# Altium PCB Motor Controller.PcbDoc (part 2 of 2)
Units mil, origin at the board's own origin, x right, y up, seen from the top; angles counter-clockwise.
Board outline 2165.35 x 2283.46 mil, 2 copper layers (Top Layer, Bottom Layer); 50 components, 51 nets, 203 pads, 72 vias.
Unrouted connection lines stored in the file: 35.
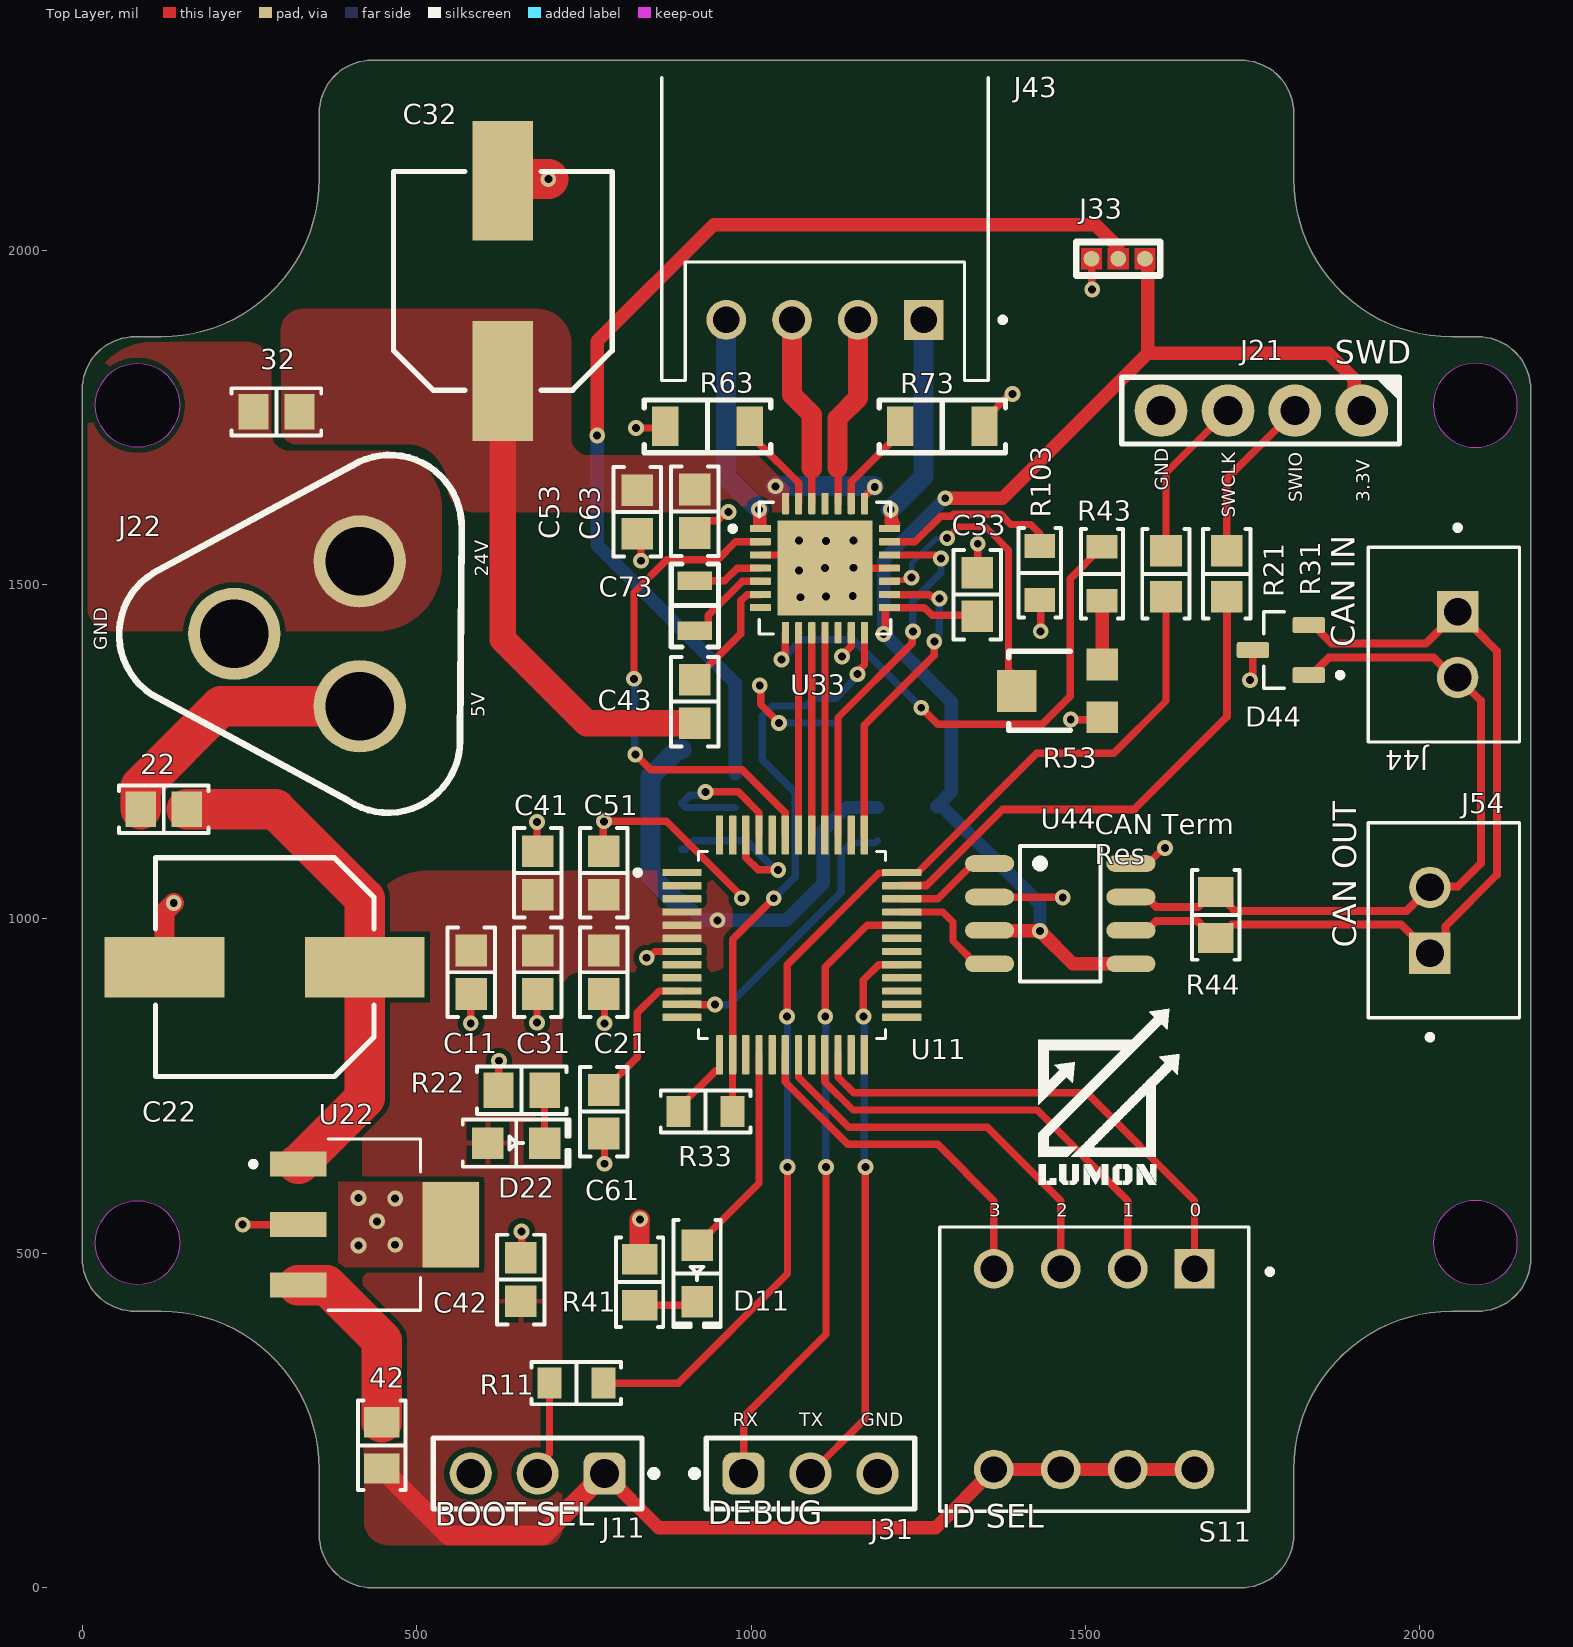
[diagram p0: Top Layer view]

## Via types
v1: diameter 23.62, hole 11.81, Top Layer to Bottom Layer, tented both sides, 71 vias
v2: diameter 23.62, hole 11.81, Top Layer to Bottom Layer, 1 vias

## Nets (pads, with @x,y where several pads share a name; then routed paths per layer and width w, separated by ;. In a path a pad name is that pad's centre, name@x,y a point inside that pad or via, vN(x,y) a via of type N, cw(c..) or ccw(c..) an arc to the next point about the centre after c; other vN are vias at no path point) (continued)
tmcRx: (continued)
  Bottom Layer w11: v1(1034,1031) 1065.91,1062.91 1065.91,1188.61 1016.69,1237.84 1016.69,1303.48 1031.52,1318.31 1082.48,1318.31 1094.29,1330.12 1127.61,1330.12 1134.05,1336.57 1134.05,1337.64 1159,1362.58 v1(1159,1366)
tmcTX: R33.2 U11.13 | length 113.6
  Top Layer w11: R33.2 891.66,717.41 947.43,773.18 952.89,773.18 U11.13
TXD: U11.34 U44.1 | length 153.2
  Top Layer w11: U11.34@1224.36,1030.09 1279.61,1030.09 1332.4,1082.88 U44.1@1355.71,1082.88
pads on no net: U11.1 U11.2 U11.3 U11.8 U11.9 U11.12 U11.15 U11.17 U11.20 U11.23 U11.24 U11.25 U11.26 U11.27 U11.28 U11.30 U11.31 U11.38 U11.44 U11.47 U11.48 U33.7 U33.12 U33.25

## Polygon pours and split planes (outlines as drawn)
3.3V on Top Layer "3.3V_L01_P008" (solid, pour order 8): 421.43,178.55 421.43,100.57 ccw(c458,100.57) 458,64 693,64 ccw(c693,89) 718,89 718,893.77 cw(c744.57,893.77) 744.57,920.34 938.34,920.34 ccw(c938.34,954) 972,954 972,1030.46 ccw(c930.19,1030.46) 930.19,1072.27 517,1072.27 ccw(c517,972.27) 417,972.27 417,964
GND on Top Layer "GND_L01_P007" (solid, pour order 7): 593.5,606.98 383,606.98 383,479.02 593.5,479.02
24V on Top Layer "24V_L01_P010" (solid, pour order 10): 298,1759 298,1732 ccw(c320,1732) 320,1710 484,1710 cw(c484,1648) 546,1648 ccw(c586,1648) 586,1608 1056,1608 ccw(c1056,1613) 1061,1613 1061,1658 ccw(c1026,1658) 1026,1693 758,1693 cw(c758,1720) 731,1720 731,1861 ccw(c680,1861) 680,1912 329,1912 ccw(c329,1880) 297,1880
Net32_1 on Top Layer "NET32_1_L01_P009" (solid, pour order 9): 283,1826 ccw(c246,1826) 246,1863 107,1863 ccw(c107,1763) 7,1763 7,1470 ccw(c47,1470) 47,1430 439,1430 ccw(c439,1529) 538,1529 538,1614 ccw(c452,1614) 452,1700 309,1700 cw(c309,1726) 283,1726
GND on Bottom Layer "GND_L02_P003" (solid, pour order 3): 0,0 2290,0 2290,2323 0,2323
3.3V on Bottom Layer "3.3V_L02_P002" (solid, pour order 2): 1158,1150 ccw(c1165,1150) 1165,1143 1315,1143 ccw(c1315,1153) 1325,1153 1325,1327 ccw(c1313,1327) 1313,1339 1169,1339 ccw(c1169,1328) 1158,1328

## Other copper
Multi-Layer:
  pour cut-out: 2019.81,1767.97 ccw(c2082.8,1767.97) 2082.8,1704.97 ccw(c2082.8,1767.97) 2145.79,1767.97 ccw(c2082.8,1767.97) 2082.8,1830.96 ccw(c2082.8,1767.97)
  pour cut-out: 2019.81,516 ccw(c2082.8,516) 2082.8,453.01 ccw(c2082.8,516) 2145.79,516 ccw(c2082.8,516) 2082.8,578.99 ccw(c2082.8,516)
  pour cut-out: 82.8,1704.97 cw(c82.8,1767.97) 19.81,1767.97 cw(c82.8,1767.97) 82.8,1830.96 cw(c82.8,1767.97) 145.79,1767.97 cw(c82.8,1767.97)
  pour cut-out: 82.8,453.01 cw(c82.8,516) 19.81,516 cw(c82.8,516) 82.8,578.99 cw(c82.8,516) 145.79,516 cw(c82.8,516)

## Silkscreen, mask and mechanical layers (free items; w line width, h text height)
Top Overlay:
  drawing of 14 lines, arcs and shapes, not listed
  text "SWD" at 1873,1818.25 h60
  text "GND" at 1624,1639.99 h20 r90
  text "SWIO" at 1824,1623.33 h20 r90
  text "3.3V" at 1925,1623.33 h20 r90
  text "SWCLK" at 1724,1600 h20 r90
  text "CAN IN" at 1914.75,1406 h60 r90
  text "CAN Term / Res" at 1513.56,1081.51 h30
  text "CAN OUT" at 1916.75,957 h60 r90
  text "3" at 1356,555 h20
  text "2" at 1456,555 h20
  text "1" at 1556,555 h20
  text "0" at 1656,555 h20
  text "RX" at 973,242 h20
  text "TX" at 1072,242 h20
  text "GND" at 1164,242 h20
  text "DEBUG" at 935,83.25 h60
  text "BOOT SEL" at 527,81.25 h60
  text "ID SEL" at 1285,78.25 h60
Mechanical 2:
  circle w0.25: c1193.49,1110.49 r0.12
  circle w0.25: c1193.49,1110.49 r0.12
Mechanical 20:
  circle w0.5: c2082.8,516 r62.99
  circle w0.25: c82.8,453.01 r0.12
  circle w0.25: c19.81,516 r0.12
  circle w0.5: c82.8,516 r62.99
  circle w0.25: c1082.8,0.25 r0.12
  circle w0.5: c2082.8,1767.97 r62.99
  circle w0.5: c82.8,1767.97 r62.99

## Text inside footprints (layer, text, board x,y; h text height)
J22: Top Overlay "5V" at 602.2,1301.88 h20 r90; Top Overlay "24V" at 607.2,1511.88 h20 r90; Top Overlay "GND" at 37.2,1401.88 h20 r90; Bottom Overlay "24V" at 520,1566.27 h20 r90; Bottom Overlay "5V" at 514.99,1331.27 h20 r90; Bottom Overlay "GND" at 140,1451.27 h20 r90
J43: Mechanical 13 "PCB Edge" at 848,2246.08 h32 r180